# Altium PCB bluebox-micro-1B.PcbDoc
Units mm, origin at the board's own origin, x right, y up, seen from the top; angles counter-clockwise.
Board outline 62 x 18.68 mm, 4 copper layers (Top Layer, L2, L3, Bottom Layer), stack 0.722 mm thick; 94 components, 70 nets, 290 pads, 134 vias.
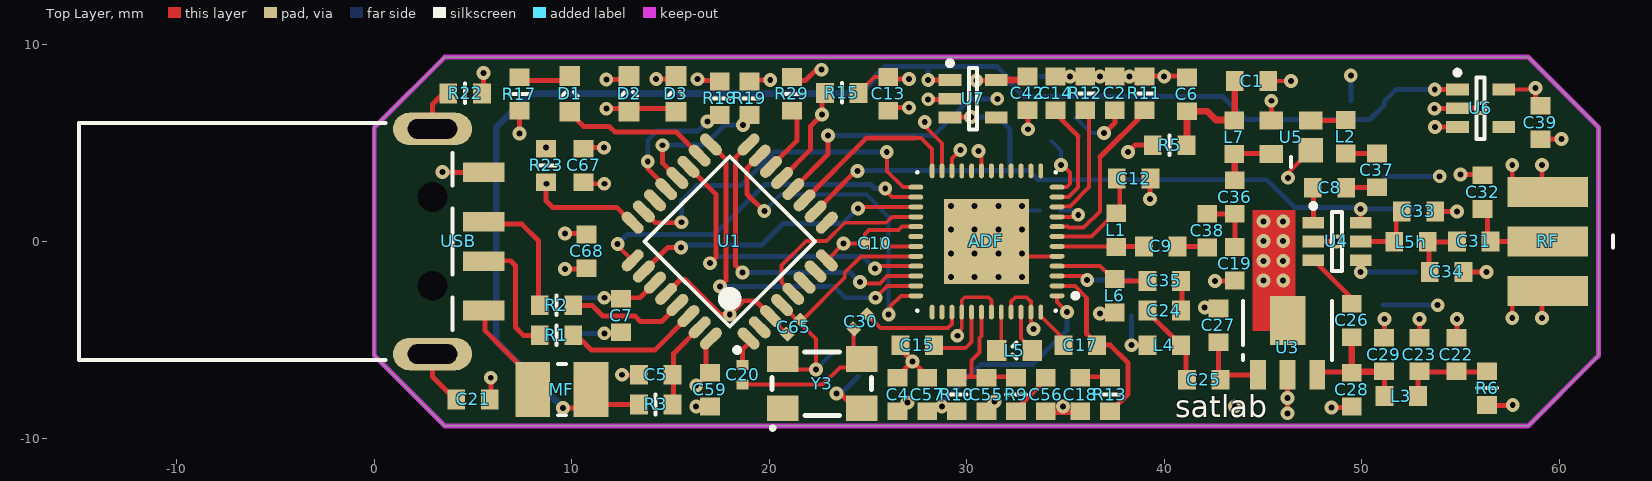
[diagram p0: Top Layer view]
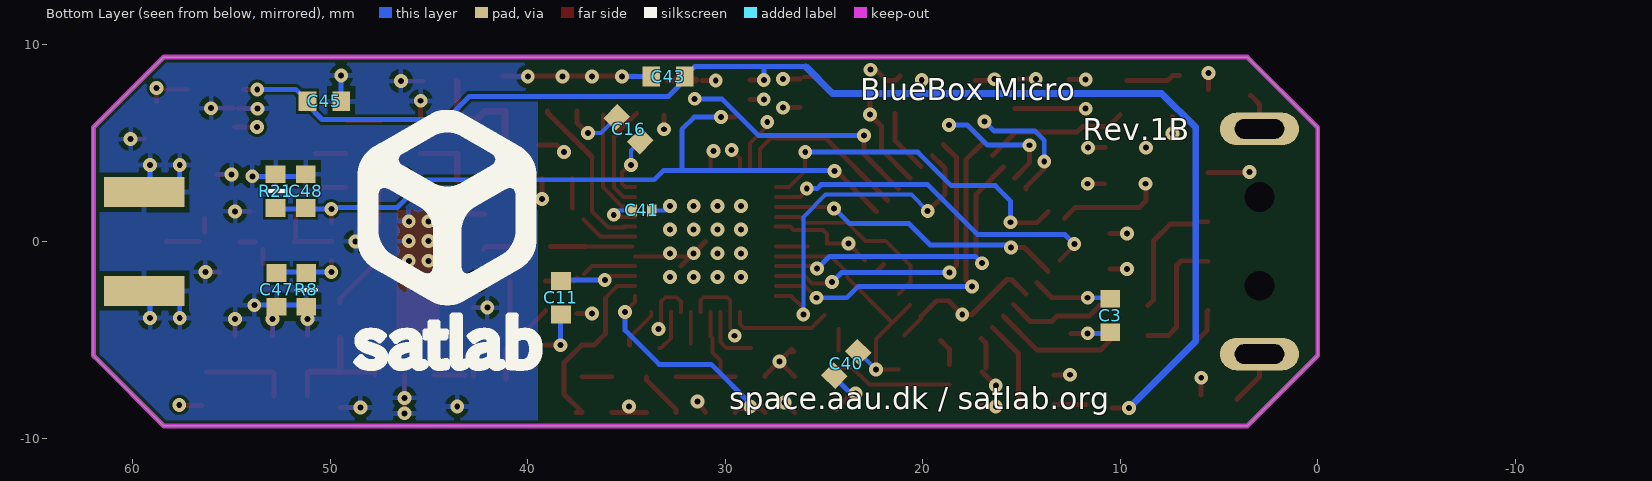
[diagram p1: Bottom Layer view, seen from below]
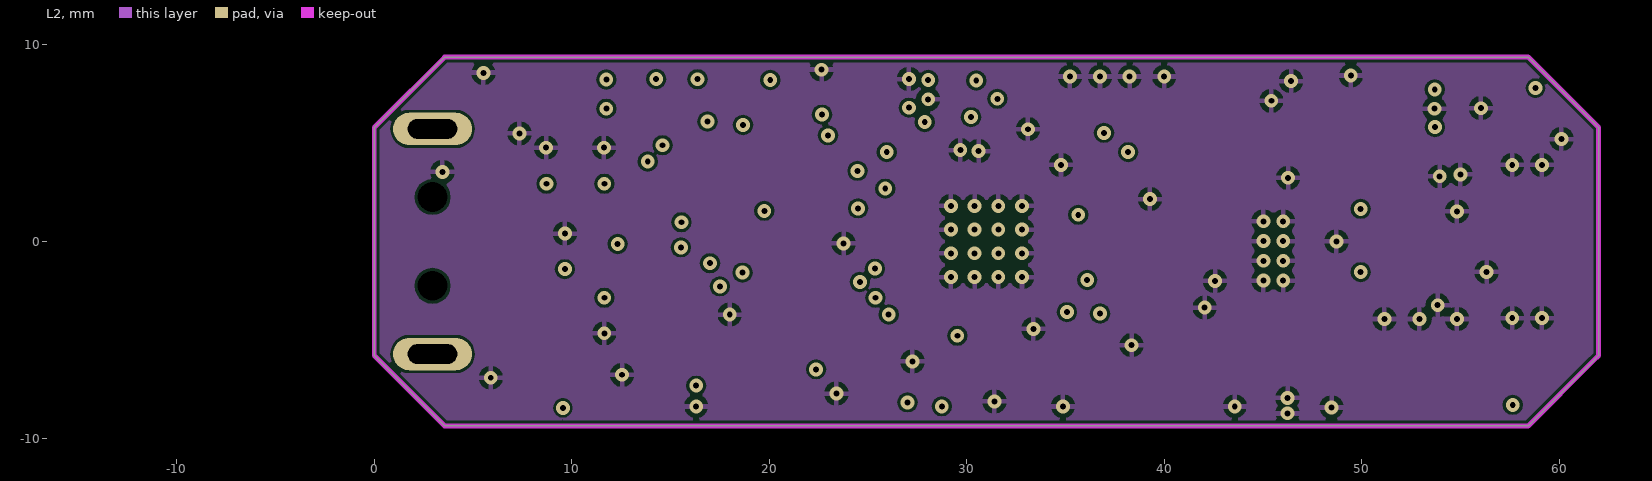
[diagram p2: L2]
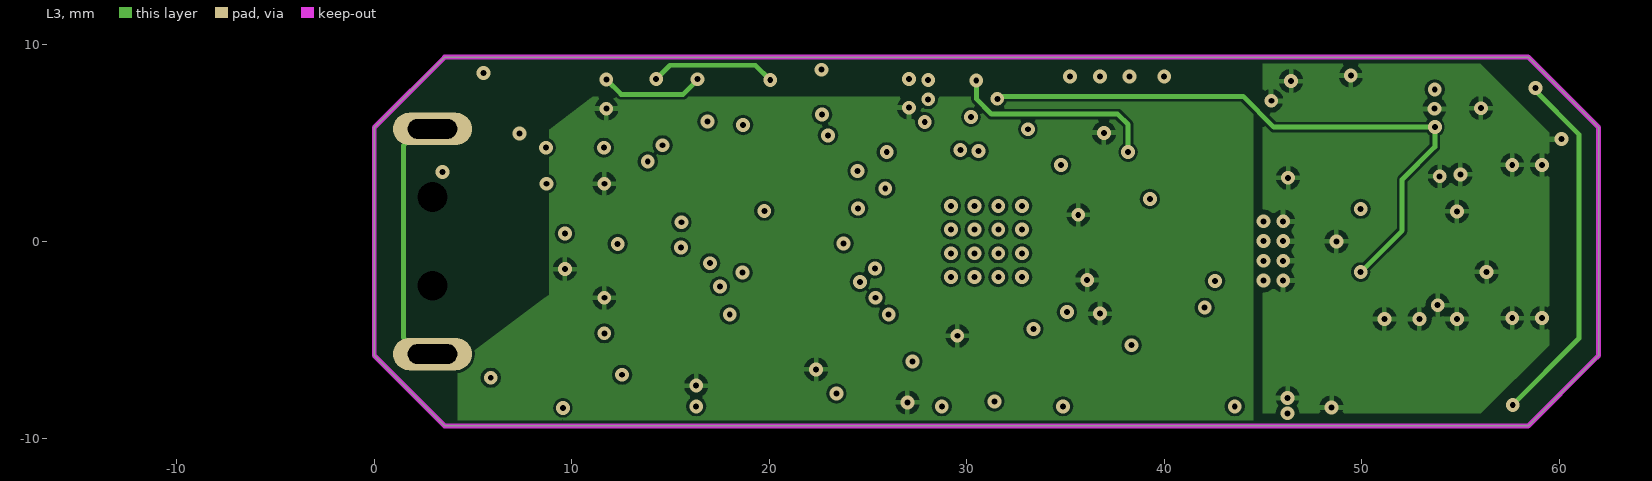
[diagram p3: L3]

## Layer stack, top to bottom
Top Solder: solder mask 0.0102, Solder Resist, Dk 3.5
Top Layer: signal copper 0.0356
Dielectric1: core 0.1981, FR-4, Dk 3.6
L2: signal copper 0.036
Dielectric 4: prepreg 0.127, Dk 4.2
L3: signal copper 0.0356
Dielectric2: core 0.254, FR-4, Dk 4.2
Bottom Layer: signal copper 0.0356
Bottom Solder: solder mask 0.0102, Solder Resist, Dk 3.5

## Board outline
3.566,-9.34 0,-5.774 0,5.772 3.566,9.338 3.566,9.34 58.434,9.34 61.734,6.04 62,5.774 62,-5.774 61.734,-6.04 58.434,-9.34

## Design rules (kind name [scope] priority, off if disabled: settings)
Clearance [All] p1: gap=0.15
MinimumSolderMaskSliver [All] p1: minsoldermaskwidth=0.075
PlaneClearance [All] p1: clearance=0.3
PlaneConnect [All] p1: planeconnectstyle=Relief reliefexpansion=0.15 reliefentries=4 reliefconductorwidth=0.254 reliefairgap=0.15
PolygonConnect [All] p1: connectstyle=Relief reliefconductorwidth=0.254 reliefentries=4 polygonreliefangle="90 Angle" airgapwidth=0.254
RoutingVias [All] p1: holewidth=0.3 width=0.5 viastyle="Through Hole" minholewidth=0.3 minwidth=0.5 maxholewidth=3 maxwidth=2
SilkToSolderMaskClearance SilkscreenOverComponentPads [IsPad] p1: minsilkscreentomaskgap=0.154 clearancetoexposedcopper=TRUE
SolderMaskExpansion [All] p1: expansion=0.075
Width [All] p1: maxlimit=2 minlimit=0.15 preferedwidth=0.2
25 further rules are at their usual default settings.

## Classes and differential pairs
component class transceiver: ADF C3 C4 C9 C9h C10 C11 C12 C12h C13 C14 C15 C16 C17 C18 C20 C30 C35 C40 C42h C55 C56 C57 C59 L1 L1h L5 L6 R9 R10 R11 R12 R13 Y3
component class mcu: C2 C5 C7 C21 C41 C60 C61 C62 C63 C64 C65 C67 C68 CaSS9 D1 D2 D3 MF Q4 R1 R2 R3 R15 R17 R18 R19 R22 R23 R29 R34 S1 U1 U2 USB Usw9 VR1
component class misc_rf: C1 C6 C8 C19 C22 C23 C24 C25 C26 C27 C28 C29 C31 C32 C33 C34 C36 C37 C38 C39 C42 C43 C45 C47 C48 C? L2 L3 L4 L5h L7 L? Q2 R5 R6 R8 R21 R? RF U3 U4 U5 U6 U7 U?

## Components (designator, comment, footprint, x,y, rotation, side; value= is the part's Value field where it differs from the comment)
ADF "ADF7021" QFN50P700X700X100-48M 31,0 r180 top
C1 "Cap Semi" C06 44.425,8.125 r0 top
C2 "Capacitor" C06 37.5,7.5 r270 top
C3 "Cap Semi" C06 10.5,-3.75 r90 bottom
C4 "Cap Semi" C06 26.5,-7.75 r270 top
C5 "Cap Semi" C06 14.25,-6.75 r0 top
C6 "Cap Semi" C06 41.15,7.45 r90 top
C7 "Cap Semi" C06 12.5,-3.75 r270 top
C8 "Cap Semi" C06 48.375,2.725 r0 top
C9 "Cap Semi" C06 39.825,-0.25 r180 top
C10 "Capacitor" C04 25.35,-0.1 r0 top
C11 "Cap Semi" C06 38.325,-2.85 r90 bottom
C12 "Cap Semi" C06 38.45,3.185 r180 top
C13 "Cap Semi" C06 26.025,7.475 r270 top
C14 "Cap Semi" C06 34.5,7.5 r270 top
C15 "Cap Semi" C06 27.5,-5.25 r0 top
C16 "Cap Semi" C06 34.9,5.685 r45 bottom
C17 "Cap Semi" C06 35.75,-5.25 r180 top
C18 "Cap Semi" C06 35.75,-7.75 r270 top
C19 "Cap Semi" C06 43.575,-1.125 r270 top
C20 "Capacitor" C04 18.65,-6.75 r270 top
C21 "Cap Semi" C06 5,-8 r0 top
C22 "Cap Semi" C06 54.8,-5.725 r90 top
C23 "Cap Semi" C06 52.925,-5.725 r90 top
C24 "Cap Semi" C06 40,-3.5 r180 top
C25 "Cap Semi" C06 42,-7 r0 top
C26 "Cap Semi" C06 49.5,-4 r270 top
C27 "Cap Semi" C06 42.75,-4.25 r270 top
C28 "Cap Semi" C06 49.5,-7.5 r270 top
C29 "Cap Semi" C06 51.125,-5.725 r90 top
C30 "Capacitor" C04 24.625,-4.075 r225 top
C31 "Capacitor" C06 55.675,0 r180 top
C32 "Capacitor" C06 56.125,2.5 r270 top
C33 "Cap Semi" C06 52.875,1.52 r0 top
C34 "Cap Semi" C06 54.3,-1.539 r0 top
C35 "Cap Semi" C06 40,-2 r0 top
C36 "Cap Semi" C06 43.575,2.25 r90 top
C37 "Cap Semi" C06 50.775,3.6 r90 top
C38 "Cap Semi" C06 42.175,0.55 r270 top
C39 "Capacitor" C06 59.05,6.025 r90 top
C40 "Cap Semi" C06 23.875,-6.2 r135 bottom
C41 "Capacitor" C04 34.225,1.575 r180 bottom
C42 "Capacitor" C06 33.075,7.5 r90 top
C43 "Capacitor" C06 32.9,8.35 r180 bottom
C45 "Capacitor" C06 50.3,7.1 r0 bottom
C47 "Capacitor" C06 52.725,-2.45 r270 bottom
C48 "Capacitor" C06 51.25,2.55 r90 bottom
C55 "Cap Semi" C06 31,-7.75 r90 top
C56 "Cap Semi" C06 34,-7.75 r90 top
C57 "Cap Semi" C06 28,-7.75 r270 top
C59 "Cap Semi" C06 17,-7.5 r90 top
C65 "Capacitor" C04 21.25,-4.349 r225 top
C67 "Capacitor" C06 10.6,3.85 r270 top
C68 "Capacitor" C06 10.75,-0.5 r270 top
D1 "RED" L06 9.9,7.475 r90 top
D2 "GREEN" L06 12.9,7.475 r90 top
D3 "BLUE" L06 15.278,7.475 r90 top
L1 "Inductor" C06 37.575,0.575 r270 top
L2 "Inductor" C06 49.2,5.3 r270 top
L3 "Inductor" C06 52,-7.825 r0 top
L4 "Inductor" C06 40,-5.25 r0 top
L5 "Inductor" L06 32.425,-5.521 r180 top
L5h "Inductor" C06 52.5,-0.015 r0 top
L6 "Inductor" C06 37.5,-2.75 r270 top
L7 "Inductor" C06 43.55,5.275 r90 top
MF "CapacitorBig" C1210 9.5,-7.5 r180 top
R1 "Resistor" R06 9.225,-4.749 r180 top
R2 "Resistor" R06 9.225,-3.225 r0 top
R3 "Resistor" R06 14.25,-8.25 r0 top
R5 "Resistor" R06 40.275,4.875 r180 top
R6 "Resistor" R06 56.35,-7.425 r270 top
R8 "Resistor" R06 51.225,-2.45 r90 bottom
R9 "Res Semi" R06 32.5,-7.75 r90 top
R10 "Res Semi" R06 29.5,-7.75 r90 top
R11 "Res Semi" R06 39,7.5 r90 top
R12 "Res Semi" R06 36,7.5 r270 top
R13 "Res Semi" R06 37.25,-7.75 r90 top
R15 "Resistor" R06 23.675,7.525 r180 top
R17 "Resistor" R06 7.353,7.468 r90 top
R18 "Resistor" R06 17.5,7.25 r90 top
R19 "Resistor" R06 19,7.25 r90 top
R21 "Resistor" R06 52.775,2.55 r270 bottom
R22 "Resistor" R06 4.6,7.5 r0 top
R23 "Resistor" R06 8.7,3.85 r270 top
R29 "Resistor" R06 21.15,7.475 r270 top
RF "50 Ohm - Linx CONSMA003.062" SMA-EGDE 61.425,0 r0 top
U1 "ATmega32U2-AU" 32A_L 18,0 r135 top
U3 "MGA-31589" SOT-223B-SMALL 46.25,-4.5 r0 top
U4 "AS193-73" SOT95P280X145-6N 48.75,0 r0 top
U5 "MBC13916" MBC13916 46.425,5.275 r90 top
U6 "" SOT23 56.025,6.75 r0 top
U7 "" SOT23 30.325,7.225 r0 top
USB "1470695-2" 1470695A 0.25,0 r180 top
Y3 "FOX924B" FOX924 20.675,-5.95 r0 top

## Footprints (in the part's own frame and the unit in brackets; to place one, negate y for a bottom-side part, rotate by r counter-clockwise, add the part's x,y. Pads: shape width x height; smd on the part's side, far side on the other; paste and mask are expansions set on the pad)
32A_L [mm] "Thin QFP, 32-Leads, Body 7x7mm, Pitch 0.8mm, IPC High Density"
  oval 1.35x0.55 smd: 1(-4.15,2.8) 2(-4.15,2) 3(-4.15,1.2) 4(-4.15,0.4) 5(-4.15,-0.4) 6(-4.15,-1.2) 7(-4.15,-2) 8(-4.15,-2.8) 17(4.15,-2.8) 18(4.15,-2) 19(4.15,-1.2) 20(4.15,-0.4) 21(4.15,0.4) 22(4.15,1.2) 23(4.15,2) 24(4.15,2.8)
  oval 0.55x1.35 smd: 9(-2.8,-4.15) 10(-2,-4.15) 11(-1.2,-4.15) 12(-0.4,-4.15) 13(0.4,-4.15) 14(1.2,-4.15) 15(2,-4.15) 16(2.8,-4.15) 25(2.8,4.15) 26(2,4.15) 27(1.2,4.15) 28(0.4,4.15) 29(-0.4,4.15) 30(-1.2,4.15) 31(-2,4.15) 32(-2.8,4.15)
  silkscreen extent -4.27,-3.05 3.05,3.75, body extent -3.5,-3.5 3.5,3.5, height 1.2
1470695A [mm] "Connector; USB1.1, Type A, SM; 4 Position; Right Angle"
  rect 2.1x1 smd: 1(-5.3,3.5) 2(-5.3,1) 3(-5.3,-1) 4(-5.3,-3.5)
  oval 4x1.65 hole 1 slot 2.5 at 0 deg: 5(-2.7,-5.7) 6(-2.7,5.7)
  round 1.2 hole 1.5 unplated: MH1(-2.7,-2.25) MH2(-2.7,2.25)
  silkscreen extent -3.7,-6 15.2,6
C04 [mm] "Chip Capacitor, 2-Leads, Body 1.0x0.5mm, IPC Low Density"
  rrect10% 0.5x0.6 smd: 1(-0.5,0) 2(0.5,0)
  body extent -0.5,-0.25 0.5,0.25, height 0.52
C06 [mm]
  rect 0.9x1 smd: 1(-0.85,0) 2(0.85,0)
  body extent -0.8,-0.41 0.8,0.41, height 0.82
C1210 [mm] "Chip Capacitor, 2-Leads, Body 3.2x2.5mm, IPC Low Density"
  rect 1.75x2.8 smd: 1(-1.475,0) 2(1.475,0)
  silkscreen extent -0.2,-1.3 0.2,1.3, body extent -1.75,-1.35 1.75,1.35, height 2.7
FOX924 [mm]
  rect 1.6x1.3 smd: 1(0,-2.5) 2(4,-2.5) 3(4,0) 4(0,0)
  silkscreen extent -0.56,-3.56 4.5,0.35, body extent -0.53,-2.83 4.5,0.35, height 1.5
L06 [mm] "Chip LED, 2-Leads, Body 1.6x0.8mm, IPC Low Density"
  rect 1x1.05 smd: 1(-0.9,0) 2(0.9,0)
  silkscreen extent -0.1,-0.4 0.1,0.4, body extent -0.85,-0.45 0.85,0.45, height 0.9
MBC13916 [mm] "SOT-143; 4 Leads; FOR LNA"
  rect 1.25x1.25 smd: 1(-0.65,-1)
  rect 0.9x1.2 smd: 2(0.85,-1) 3(0.85,1) 4(-0.85,1)
  silkscreen extent -1.5,0 -1,0
QFN50P700X700X100-48M [mm]
  oval 0.75x0.25 smd mask+0.154: 1(-3.575,2.75) 2(-3.575,2.25) 3(-3.575,1.75) 4(-3.575,1.25) 5(-3.575,0.75) 6(-3.575,0.25) 7(-3.575,-0.25) 8(-3.575,-0.75) 9(-3.575,-1.25) 10(-3.575,-1.75) 11(-3.575,-2.25) 12(-3.575,-2.75) 25(3.575,-2.75) 26(3.575,-2.25) 27(3.575,-1.75) 28(3.575,-1.25) 29(3.575,-0.75) 30(3.575,-0.25) 31(3.575,0.25) 32(3.575,0.75) 33(3.575,1.25) 34(3.575,1.75) 35(3.575,2.25) 36(3.575,2.75)
  oval 0.25x0.75 smd mask+0.154: 13(-2.75,-3.575) 14(-2.25,-3.575) 15(-1.75,-3.575) 16(-1.25,-3.575) 17(-0.75,-3.575) 18(-0.25,-3.575) 19(0.25,-3.575) 20(0.75,-3.575) 21(1.25,-3.575) 22(1.75,-3.575) 23(2.25,-3.575) 24(2.75,-3.575) 37(2.75,3.575) 38(2.25,3.575) 39(1.75,3.575) 40(1.25,3.575) 41(0.75,3.575) 42(0.25,3.575) 43(-0.25,3.575) 44(-0.75,3.575) 45(-1.25,3.575) 46(-1.75,3.575) 47(-2.25,3.575) 48(-2.75,3.575)
  rect 4.3x4.3 smd mask+0.154: 49(0,0)
  silkscreen extent -4.62,-3.53 3.53,3.52, body extent -3.5,-3.5 3.5,3.5, height 1
R06 [mm]
  rect 0.9x1 smd: 1(-0.85,0) 2(0.85,0)
  silkscreen extent 0,-0.5 0,0.5, body extent -0.8,-0.4 0.8,0.4, height 0.55
SMA-EGDE [mm] "Linx CONSMA003.062"
  rect 4.06x1.52 smd: 1(-2,-2.5) 1(-2,2.5) 2(-2,0)
  rect 4.06x1.52 smd far side: 1(-2,-2.5) 1(-2,2.5)
  silkscreen extent 1.3,-0.3 1.3,0.3
SOT23 [mm] "SOT23, 5-Leads, Body 3,1x3,2mm (max), Pitch 0,95mm, IPC Medium Density"
  rect 1.15x0.6 smd: 1(-1.175,0.95) 2(-1.175,0) 3(-1.175,-0.95) 4(1.175,-0.95) 5(1.175,0.95)
  silkscreen extent -1.3,-1.55 0.2,1.92, body extent -0.9,-1.55 0.9,1.55, height 1.45
SOT95P280X145-6N [mm] "SOT23, 6-Leads, Body 3,0x3,0mm (max), Pitch 0,95mm, IPC Medium Density"
  rect 1.1x0.6 smd: 1(-1.2,0.95) 2(-1.2,0) 3(-1.2,-0.95) 4(1.2,-0.95) 5(1.2,0) 6(1.2,0.95)
  silkscreen extent -1.32,-1.5 0.25,1.92, body extent -0.87,-1.52 0.87,1.53, height 1.45
SOT-223B-SMALL [mm] "used for PA in bluebox micro"
  rect 0.8x1.5 smd: 1(-1.5,-2.25) 2(0,-2.25) 3(1.5,-2.25)
  rect 1.8x2.5 smd: 4(0,0.5)
  silkscreen extent -2.25,-1.5 2.25,1.5

## Part data
ADF: "ADF7021 transceiver"
C1 C3 C4 C5 C6 C7 C8 C9 C11 C12 C13 C14 C15 C16 C17 C18 C19 C21 C22 C23 C24 C25 C26 C27 C28 C29 C33 C34 C35 C36 C37 C38 C40 C55 C56 C57 C59: "Capacitor (Semiconductor SIM Model)"
C2 C10 C20 C30 C31 C32 C39 C41 C42 C43 C45 C47 C48 C65 C67 C68: "Capacitor, standard"
D1 D2 D3: library part LED, "Typical RED GaAs LED"
MF: "Capacitor for PRU etc."
R9 R10 R11 R12 R13: "Semiconductor Resistor"
RF: library part SMA_BOARD_EGDE, "Linx CONSMA003.062  -  SMA Female Edge Mount for 1.6 mm PCB"
U1: "8-bit AVR Microcontroller, 2.7-5.5V, 32KB Flash, 1KB EEPROM, 1KB SRAM, 32-pin TQFP, Industrial Grade (-40°C to 85°C)"
U3: "0.5 W High Gain Driver Amplifier"
U4: "PHEMT GaAs IC High-Linearity 3 V  Control SPDT Switch 0.1–2.5 GHz"
U6 U7: library part TC1185, "Voltage regulater from Microchip"
USB: "USB 1.1, Right Angle, SMT, A Type, Plug, 4 Position, Natural"
Y3: "FOX924B TCXO 19.44 MHz"

## Via types
v1: diameter 0.7, hole 0.3, Top Layer to Bottom Layer, tented both sides, 118 vias
v2: diameter 0.7, hole 0.3, Top Layer to Bottom Layer, 16 vias

## Nets (pads, with @x,y where several pads share a name; then routed paths per layer and width w, separated by ;. In a path a pad name is that pad's centre, name@x,y a point inside that pad or via, vN(x,y) a via of type N, cw(c..) or ccw(c..) an arc to the next point about the centre after c; other vN are vias at no path point)
C-RX: C48.1 R21.2 U1.10 U4.6 U7.3 | length 37.9
  Top Layer w0.25: U1.10 24.353,3.55 v1@24.5,3.55 ; U7.3@29.515,6.3 v1(30.215,6.3) ; U4.6 v1(49.95,1.65)
  Bottom Layer w0.25: v1@24.5,3.55 24.65,3.675 24.725,3.6 32.2,3.6 ; v1(30.215,6.3) 31.575,6.3 32.2,5.675 32.2,3.6 ; R21.2@52.775,1.65 v1(49.95,1.65) 49.875,1.725 46.6,1.725 45.2,3.125 33.6,3.125 33.125,3.6 32.2,3.6
  other v1: 24.475,3.575
C-TX: C47.1 R8.2 U1.12 U4.4 U6.3 | length 49
  Top Layer w0.25: U1.12 22.975,4.409 v1(22.975,5.375) ; v1(49.95,-1.55) U4.4 ; v1(53.71,5.793) U6.3@54.85,5.793
  L3 w0.25: v1@31.65,7.25 31.75,7.35 44,7.35 45.557,5.793 v1(53.71,5.793) 53.71,4.795 52.05,3.135 52.05,0.55 v1(49.95,-1.55)
  Bottom Layer w0.25: v1(22.975,5.375) 28.325,5.375 30.175,7.225 v1(31.55,7.225) ; v1(49.95,-1.55) C47.1@52.725,-1.55
CE: ADF.24 U1.11 | length 9.1
  Top Layer w0.2: 27.4,5.25 27.675,5.25 28.25,4.675 ADF.24
  Top Layer w0.25: U1.11 24.947,5.25 27.398,5.25
CLK_OUT: ADF.36 U1.15 | length 17.2
  Top Layer w0.2: v1@26.15,-3.525 26.15,-3.275 26.675,-2.75 ADF.36
  Top Layer w0.25: U1.15 18.875,3.703 18.875,2.4 v1@19.725,1.55
  Bottom Layer w0.2: v1(19.75,1.55) 20.575,2.375 24.925,2.375 26.05,1.25 v1(26.05,-3.7)
CPOUT: ADF.42 C55.2 R9.2 R10.2 | length 6.5
  Top Layer w0.2: 30.25,-6.85 30.25,-6.025 30.65,-5.625 30.65,-4.875 30.75,-4.775 ADF.42
  Top Layer w0.25: R10.2@29.5,-6.85 R9.2@32.5,-6.85
CREG3: ADF.41 C15.2 | length 3.2
  Top Layer w0.2: C15.2@28.7,-5.4 29.95,-5.4 30.25,-5.1 ADF.41
D+: R2.1 USB.3 | length 6.6
  Top Layer w0.25: USB.3 6.2,1 6.325,0.875 7.475,0.875 8.325,0.025 8.325,-2.975 R2.1@8.6,-3.25
D-: R1.2 USB.2 | length 6.6
  Top Layer w0.25: USB.2 USB.2@6.2,-1 ; USB.2@6.05,-0.975 6.9,-0.975 7.15,-1.225 7.15,-4.35 7.55,-4.75 R1.2@8.6,-4.75
DATA_CLK: ADF.35 U1.17 | length 18.2
  Top Layer w0.2: v1(25.375,-2.85) 25.975,-2.25 ADF.35
  Top Layer w0.25: U1.17 17.8,4.16 17.8,-1.975 v1(17.5,-2.275)
  Bottom Layer w0.25: v1@17.6,-2.375 v1(17.5,-2.275) 23.275,-2.275 23.85,-2.85 v1(25.375,-2.85)
DATA_IO: ADF.34 U1.16 | length 16.2
  Top Layer w0.2: v1(24.588,-2.05) 24.663,-2.125 25.6,-2.125 25.975,-1.75 ADF.34
  Top Layer w0.25: v1(18.65,-1.575) 18.3,-1.225 18.3,4.26 U1.16 ; v1@24.675,-1.925 v1@24.725,-1.875
  Bottom Layer w0.25: v1@18.675,-1.55 v1(18.65,-1.575) 24.113,-1.575 v1(24.588,-2.05)
GND: ADF.5 ADF.12 ADF.19 ADF.22 ADF.29 ADF.45 ADF.47 ADF.49 C1.2 C2.1 C3.1 C4.1 C5.1 C6.2 C7.2 C10.1 C11.1 C12.1 C13.1 C14.1 C15.1 C16.1 C18.2 C19.2 C21.2 C22.2 C23.2 C27.1 C28.2 C29.2 C32.1 C33.2 C34.2 C39.1 C40.1 C41.2 C42.1 C43.1 C45.1 C47.2 C48.2 C55.1 C56.1 C57.1 C59.1 C65.2 C67.1 C68.1 L4.1 R8.1 R11.2 R12.1 R15.1 R17.1 R21.1 R22.2 R23.1 R29.1 RF.1 U1.3 U1.8 U1.28 U3.2 U3.4 U4.2 U5.1 U5.3 U6.2 U7.2 USB.4 Y3.2 | length 97.1
  Top Layer w0.2: U1.3@20.086,-3.893 C65.2@20.921,-4.729 ; U1.8 v1(23.769,-0.1) C10.1 ; R15.1 25.325,8.325 C13.1 ; C10.1@24.855,-0.075 24.855,0.38 25.05,0.575 26.55,0.575 26.725,0.75 ADF.29@27.45,0.75 ; ADF.22 29.25,4.2 v1(29.675,4.625) ; ADF.19 v1@30.75,4.35 ; ADF.49@31.75,-0.75 ADF.5 ; ADF.45 32.25,-3.05 32.475,-2.825 33.025,-2.825 33.25,-3.05 ADF.47 v1@33.25,-4.325 ; ADF.12 35.05,2.75 35.225,2.925 35.225,3.5 v1@34.9,3.825 ; C1.2 v1(46.425,8.125) ; v1(46.275,3.225) 46.275,3.475 U5.1
  Top Layer w0.25: v1@3.475,3.5 USB.4 ; R22.2@5.525,7.689 v1(5.525,8.539) ; C21.2@5.9,-7.775 v1@5.9,-6.925 ; R17.1@6.975,6.625 R17.1@7,6.6 ; v1(7.35,5.475) R17.1@7.35,6.325 ; v1@9.675,0.4 C68.1@10.525,0.4 ; C67.1@10.775,4.75 v1(11.625,4.75) ; v1(11.65,-4.65) C7.2@12.5,-4.65 ; v1(12.55,-6.75) C5.1@13.35,-6.75 ; U1.28 15.509,-1.925 15.733,-1.925 17.508,-3.7 v1(18,-3.7) 18.7,-3 19.303,-3 U1.3 ; v1@16.3,-8.4 C59.1@17,-8.4 ; v1@16.35,-8.3 C59.1@17.05,-8.3 ; R29.1@21.15,8.375 21.375,8.15 21.825,8.15 22.375,8.7 v1@22.475,8.7 ; v1@23.6,-7.7 Y3.2@24.4,-8.5 ; C13.1@26.225,8.225 v1(27.075,8.225) ; C4.1@26.5,-6.85 26.5,-6.825 v1(27.25,-6.075) ; C15.1@26.65,-5.45 26.525,-5.575 26.775,-5.575 28,-6.8 C57.1@28,-6.85 ; v1(28.05,7.2) U7.2@28.75,7.2 ; C55.1@31,-8.65 v1(31.4,-8.1) ; ADF.49 ADF.49@32.25,-1.25 ; v1(33.1,5.685) C42.1@33.1,6.385 ; C56.1@34,-8.65 C18.2@35.75,-8.65 ; C14.1@34.5,8.375 C6.2@41.25,8.375 ; v1(38.35,-5.25) L4.1@39.1,-5.25 ; v1@39.275,2.075 C12.1@39.275,3.185 ; v1(42.05,-3.35) C27.1@42.75,-3.35 ; v1(42.575,-2) C19.2@43.275,-2 ; 44.7,-4 U3.4 ; U5.3@45.425,6.15 45.425,7.075 v1@45.55,7.2 ; U3.4@45.525,-3.625 45.525,-2.175 ; v1(46.25,-8.7) U3.2@46.25,-7.25 ; v1@46.25,-7.85 U3.2 ; U4.2 v1@48.7,0 ; v1@48.625,-8.4 C28.2@49.5,-8.4 ; C29.2@51.15,-4.75 v1@51.15,-3.95 ; C23.2@52.925,-4.75 v1@52.925,-3.95 ; v1(53.685,6.725) U6.2@54.675,6.725 ; C33.2@54.075,1.525 v1(54.825,1.525) ; C22.2@54.825,-4.75 v1@54.825,-3.95 ; U6.2@54.925,6.75 v1(56.04,6.75) ; v1(55,3.4) C32.1@55.75,3.4 ; C34.2@55.575,-1.539 v1(56.325,-1.539) ; v1(57.625,-3.875) RF.1@57.625,-3.175 ; RF.1@57.625,3.175 v1(57.625,3.875) ; v1(59.125,-3.875) RF.1@59.125,-3.2 ; RF.1@59.125,3.025 v1(59.125,3.875) ; C39.1@59.415,5.186 v1(60.115,5.186)
  Bottom Layer w0.2: v2(32.8,1.8) 33.025,1.575 C41.2 ; C16.1 34.775,4.608 v1(34.775,3.875)
  Bottom Layer w0.25: C3.1@10.5,-4.65 v1(11.65,-4.65) ; v1@23.6,-7.7 23.648,-7.7 C40.1@24.511,-6.836 ; C43.1 v1(35.225,8.35) ; v1(38.35,-5.25) C11.1@38.35,-3.775 ; C45.1 v1@49.45,8.325 ; R8.1@51.075,-3.225 v1(53.85,-3.225) ; C48.2@51.175,3.3 v1(53.95,3.3) ; v1(57.625,-3.875) RF.1@57.625,-3.175 ; RF.1@57.625,3.175 v1(57.625,3.875) ; v1(59.125,-3.875) RF.1@59.125,-2.85 ; RF.1@59.125,2.85 v1(59.125,3.875)
  other v1: 48.475,-8.4 16.3,-8.35 34.875,-8.35 43.575,-8.35 46.25,-7.925 23.4,-7.7 5.9,-6.9 33.375,-4.429 51.15,-3.925 52.925,-3.925 54.825,-3.925 45.025,-1.979 46.025,-1.979 45.025,-0.979 46.025,-0.979 48.725,0 45.025,0.021 46.025,0.021 9.65,0.4 45.025,1.021 46.025,1.021 39.275,2.15 3.45,3.525 30.6,4.575 8.7,4.75 45.425,7.125 36.75,8.35 38.25,8.35 40,8.35 49.45,8.4 22.65,8.7
  other v2: 29.2,-1.8 30.4,-1.8 31.6,-1.8 32.8,-1.8 29.2,-0.6 30.4,-0.6 31.6,-0.6 32.8,-0.6 29.2,0.6 30.4,0.6 31.6,0.6 32.8,0.6 29.2,1.8 30.4,1.8 31.6,1.8
HWB: R15.2 U1.13 | length 5
  Top Layer w0.25: U1.13 22.1,4.666 22.1,5.85 v1(22.675,6.425) R15.2@22.675,7.375
L1: ADF.46 L5.1 | length 2.1
  Top Layer w0.2: ADF.46 32.75,-4.9 33.25,-5.4 L5.1@33.325,-5.4
L2: ADF.44 L5.2 | length 1.6
  Top Layer w0.2: L5.2@31.75,-5.175 ADF.44
LED_P: R19.1 U1.20 | length 6.5
  Top Layer w0.25: v1(14.6,4.875) 14.6,3.966 U1.20
  Bottom Layer w0.25: v1(14.6,4.875) 16.725,4.875 17.75,5.9 v1(18.675,5.9)
LED_R: R18.1 U1.21 | length 6.3
  Top Layer w0.25: v1(13.85,4.05) 13.85,3.675 14.783,2.742 U1.21
  Bottom Layer w0.25: v1(13.85,4.05) 13.85,5.125 14.325,5.6 16.4,5.6 v1(16.875,6.075)
LED_T: D1.1 U1.18 | length 7.3
  Top Layer w0.25: D1.1@10,6.425 10.6,5.825 11.906,5.825 12.181,5.55 15.278,5.55 U1.18
MUXOUT: U1.7 | length 0.5
  Top Layer w0.25: U1.7@21.975,-1.15 U1.7@22.35,-1.525
NetADF_2: ADF.2 C17.1 R13.1 | length 9.5
  Top Layer w0.2: ADF.2 35.475,-2.25 36.075,-2.85
  Top Layer w0.25: 36.075,-2.85 36.075,-4.675 36.65,-5.25 37.275,-5.25 38.175,-6.15 38.175,-7.725 37.25,-8.65 R13.1@37.55,-8.65
NetADF_4: ADF.4 C35.1 L6.1 | length 4.4
  Top Layer w0.2: ADF.4 36.75,-1.25 L6.1@37.15,-1.65
  Top Layer w0.25: L6.1@37.5,-1.85 37.65,-2 C35.1@39.1,-2
NetADF_6: ADF.6 C9.2 L1.2 | length 4.1
  Top Layer w0.2: ADF.6@34.7,-0.25 37.025,-0.25
  Top Layer w0.25: L1.2@37.1,-0.25 C9.2@38.85,-0.25
NetADF_7: ADF.7 C12.2 L1.1 | length 4.5
  Top Layer w0.2: ADF.7 36.325,0.25 L1.1@37.187,1.112
  Top Layer w0.25: L1.1@37.75,1.7 C12.2@37.75,3.2
NetADF_8: ADF.8 R11.1 | length 8.5
  Top Layer w0.2: ADF.8 35.1,0.75 35.15,0.7 35.925,0.7 36.75,1.525 36.75,4.275
  Top Layer w0.25: 36.75,4.275 39,6.525 R11.1@39,6.6
NetADF_10: ADF.10 R12.2 | length 5.7
  Top Layer w0.2: ADF.10 34.6,1.775 35.225,1.775 36.2,2.75 36.2,6.4 R12.2@36.175,6.425
NetADF_11: ADF.11 C14.2 | length 5.5
  Top Layer w0.2: ADF.11 35.15,2.25 35.625,2.725 35.625,5.35
  Top Layer w0.25: C14.2@34.5,6.475 35.625,5.35
NetADF_31: ADF.31 C10.2 | length 1.6
  Top Layer w0.2: C10.2@25.825,-0.25 ADF.31
NetADF_39: ADF.39 C30.1 | length 5.2
  Top Layer w0.2: C30.1 25.632,-4.375 29.05,-4.375 29.25,-4.175 ADF.39
NetADF_48: ADF.48 C17.2 | length 2.1
  Top Layer w0.2: ADF.48 33.75,-3.775 C17.2@34.85,-4.875
  Top Layer w0.25: C17.2@34.85,-5.25 C17.2@34.85,-4.875
NetC1_1: C1.1 C6.1 L7.2 R5.1 | length 6.4
  Top Layer w0.34: R5.1 41.15,4.9 C6.1 42.175,6.6 42.625,6.15 L7.2@43.575,6.15 ; L7.2 L7.2@43.575,6.15 ; C1.1 L7.2@43.575,6.15
NetC5_2: C5.2 R3.2 U1.31 | length 4.5
  Top Layer w0.25: R3.2@15.15,-8.25 15.15,-5.678 U1.31
NetC8_2: C8.2 C37.1 | length 1.5
  Top Layer w0.25: C8.2 C37.1@50.75,2.725
NetC18_1: C18.1 R13.2 | length 1.5
  Top Layer w0.25: C18.1@35.75,-6.85 R13.2@37.25,-6.85
NetC19_1: C19.1 C36.1 C38.1 | length 3.1
  Top Layer w0.25: C38.1 C36.1 C19.1
NetC20_2: C20.2 C30.2 Y3.3 | length 7.2
  Top Layer w0.2: C20.2 22.7,-7.25 23.575,-6.375 Y3.3@24.375,-6.375 ; Y3.3@24.271,-5.521 C30.2
NetC21_1: C21.1 R22.1 USB.5 USB.6 | length 18
  Top Layer w0.25: USB.6 2.95,-6.85 C21.1@4.1,-8 ; USB.5 2.95,6.95 R22.1@3.4,7.4
  L3 w0.25: USB.6 2.3,-5.7 1.475,-4.875 1.475,4.85 2.325,5.7 USB.5
NetC22_1: C22.1 C23.1 L3.2 R6.1 | length 4.5
  Top Layer w0.25: L3.2 C23.1@52.85,-6.65 ; C23.1@52.925,-6.6 R6.1@56.275,-6.6
NetC24_2: C24.2 C25.1 L4.2 | length 4.1
  Top Layer w0.25: C24.2@39.1,-3.5 L4.2 L4.2@40.9,-5.25 ; C25.1@41.1,-7 L4.2@41.1,-5.45
NetC25_2: C25.2 C27.2 U3.1 | length 3.3
  Top Layer w0.25: C25.2@42.75,-6.85 C27.2@42.75,-5.15 ; C25.2@43.15,-6.75 U3.1
NetC26_2: C26.2 C28.1 C29.1 L3.1 U3.3 | length 6.7
  Top Layer w0.25: U3.3 U3.3@47.75,-6.125 ; U3.3@47.9,-6.6 C28.1@49.5,-6.6 ; L3.1 C29.1@51.15,-6.6
  Top Layer w0.34: C26.2@49.5,-4.9 49.5,-6.6 C29.1@51,-6.6
NetC31_2: C31.2 C34.1 L5h.2 | length 1.5
  Top Layer w0.25: C34.1@53.4,-1.154 L5h.2@53.4,-0.404 ; 53.821,-0.025 C31.2@54.571,-0.025
NetC33_1: C33.1 L5h.1 U4.5 | length 3.2
  Top Layer w0.25: U4.5@49.925,0 L5h.1@51.85,0 ; L5h.1@51.75,0.1 C33.1@51.75,1.35
NetC36_2: C36.2 L7.1 U5.4 | length 3.2
  Top Layer w0.25: L7.1@43.525,4.45 U5.4@45.45,4.45
  Top Layer w0.34: C36.2 L7.1@43.575,4.4
NetC37_2: C37.2 L2.2 | length 1.6
  Top Layer w0.25: L2.2 C37.2
NetC56_2: C56.2 R9.1 | length 2.4
  Top Layer w0.25: R9.1@32.5,-8.65 32.5,-8.5 34,-7 C56.2@34,-6.85
NetD1_2: D1.2 R17.2 | length 2.8
  Top Layer w0.25: R17.2@7,8.4 7.35,8.4 7.6,8.15 D1.2@9.65,8.15
NetD2_2: D2.2 R18.2 | length 7.2
  Top Layer w0.25: v1(11.75,8.2) D2.2@12.6,8.2 ; v1@16.35,8.275 16.475,8.15 R18.2@17.325,8.15
  L3 w0.25: v1(11.75,8.2) 12.5,7.45 15.64,7.45 16.407,8.218 v1@16.35,8.275
  other v1: 16.365,8.218
NetD3_2: D3.2 R19.2 | length 8.1
  Top Layer w0.25: v1(14.275,8.225) D3.2@15.125,8.225 ; R19.2@19.2,8.175 v1(20.05,8.175)
  L3 w0.25: v1(14.275,8.225) 14.975,8.925 19.3,8.925 v1(20.05,8.175)
NetL2_1: L2.1 U5.2 | length 1.8
  Top Layer w0.25: U5.2 L2.1@49.175,6.125
NetMF_2: MF.2 USB.1 | length 4.5
  Top Layer w0.25: USB.1 5.6,-3.55 5.6,-4.5 MF.2@8.025,-6.925
NetR1_1: R1.1 U1.30 | length 6.6
  Top Layer w0.25: R1.1@10.4,-4.75 10.4,-4.9 11,-5.5 14.197,-5.5 U1.30
NetR2_2: R2.2 U1.29 | length 5.7
  Top Layer w0.25: R2.2@10.4,-3.25 11.05,-3.25 11.583,-3.783 13.208,-3.783 13.475,-4.05 14.55,-4.05 U1.29@15.4,-3.2
NetR23_2: R23.2 U1.24 | length 5.4
  Top Layer w0.25: R23.2@8.7,2.925 8.7,2.05 9.025,1.725 12.275,1.725 U1.24@12.836,1.164
  other v1: 8.725,2.925
NetR29_2: R29.2 U1.14 | length 3.2
  Top Layer w0.25: U1.14 21.4,5.097 R29.2@21.4,6.475
PA_IN: C24.1 C35.2 | length 1.5
  Top Layer w0.25: C24.1@40.9,-3.5 C35.2@40.9,-2
PA_OUT: C26.1 U4.3 | length 2.9
  Top Layer w0.25: U4.3@47.575,-0.95 49.5,-2.875 C26.1@49.5,-3.1
RF: C31.1 C32.2 RF.2 | length 2.4
  Top Layer w0.25: C31.1@56.375,0.45 C32.2@56.375,1.2 ; C31.1@56.66,0 RF.2@58.3,0
RF_LNA_IN: C8.1 U4.1 | length 2
  Top Layer w0.25: U4.1 C8.1@47.55,3
RF_LNA_OUT: C9.1 C38.2 | length 1.7
  Top Layer w0.25: C9.1@40.65,-0.25 42.1,-0.25 C38.2@42.25,-0.4
SCCLK: ADF.28 U1.5 | length 9.5
  Top Layer w0.2: U1.5 20.625,-2.059 20.625,-1.225 21.875,0.025 22.9,0.025 23.825,0.95 25.925,0.95 26.225,1.25 ADF.28
SDATA: ADF.26 U1.25 | length 17.6
  Top Layer w0.2: v1@12.325,-0.194 U1.25 ; v1@25.9,2.575 26.225,2.25 ADF.26
  Bottom Layer w0.25: v1(12.325,-0.125) 12.8,0.35 17.225,0.35 19.75,2.875 25.15,2.875 25.35,2.675 v1@25.825,2.675
  other v1: 25.875,2.675
SLE: ADF.25 U1.23 | length 17.4
  Top Layer w0.2: v1@25.975,4.475 25.975,3.55 26.775,2.75 ADF.25
  Top Layer w0.25: U1.23 14.222,0.95 v1@15.575,0.95
  Bottom Layer w0.25: v1@15.562,0.988 15.562,2.062 16.325,2.825 18.55,2.825 20.25,4.525 v1@25.975,4.525
  other v1: 15.55,0.975 25.95,4.525
SREAD: ADF.27 U1.26 | length 15.1
  Top Layer w0.2: v1@24.6,1.75 ADF.27
  Top Layer w0.25: U1.26 14.872,-0.3 v1@15.575,-0.3
  Bottom Layer w0.25: v1@15.475,-0.3 15.6,-0.175 19.625,-0.175 20.7,0.9 23.7,0.9 v1@24.475,1.675
  other v1: 15.525,-0.3 24.5,1.675
SWD: ADF.33 U1.19 | length 16.3
  Top Layer w0.2: v1@25.55,-1.25 ADF.33
  Top Layer w0.25: U1.19 17.3,2.397 17.3,-0.8 v1(17,-1.1)
  Bottom Layer w0.25: v1@16.925,-1.075 v1@16.975,-1.025 ; v1(17,-1.1) 17.35,-0.75 24.725,-0.75 v1(25.35,-1.375)
TEST_A: ADF.23 | length 2.6
  Top Layer w0.2: v1@27.925,5.8 28.75,4.975 ADF.23
  other v1: 27.875,6.05
V_BUS: C43.2 C45.2 MF.1 R3.1 U6.1 U7.1 | length 70.9
  Top Layer w0.25: v1@9.575,-8.425 MF.1@10.425,-8.425 ; MF.1@11.725,-8.25 R3.1@13.35,-8.25 ; v1(28.05,8.175) U7.1@28.75,8.175 ; v1(53.7,7.7) U6.1@54.4,7.7
  Bottom Layer w0.25: 25.925,8.85 31.55,8.85 C43.2 32.05,8.175 32.875,7.35 42.95,7.35 44.125,6.175 50.425,6.175 51.15,6.9 C45.2 51.75,7.7 v1(53.7,7.7) ; v1(28.05,8.175) 28.05,8.85
  Bottom Layer w0.35: v1(9.55,-8.425) 6.175,-5.05 6.175,5.775 7.9,7.5 24.575,7.5 25.925,8.85
V_BUS_LNA: C42.2 R5.2 U7.5 | length 14.1
  Top Layer w0.25: v1(30.485,8.15) U7.5@31.185,8.15 ; v1(38.175,4.525) 38.525,4.875 R5.2
  Top Layer w0.34: U7.5 C42.2@32.9,8.175
  L3 w0.25: v1(30.485,8.15) 30.485,7.22 31.255,6.45 37.65,6.45 38.175,5.925 v1(38.175,4.525)
V_BUS_PA: C39.2 R6.2 U6.5 | length 21.5
  Top Layer w0.2: U6.5 v1@58.735,7.7
  Top Layer w0.25: R6.2@56.5,-8.3 v1@57.325,-8.3 ; C39.2@58.8,7.065 v1(58.8,7.765)
  L3 w0.25: v1@57.595,-8.32 61,-4.915 61,5.425 58.8,7.625 v1(58.8,7.765)
  other v1: 57.65,-8.275
VCC: ADF.3 ADF.9 ADF.32 ADF.40 ADF.43 C2.2 C3.2 C4.2 C7.1 C11.2 C13.2 C16.2 C40.2 C41.1 C59.2 C65.1 C67.2 C68.2 D2.1 D3.1 L6.2 U1.4 U1.27 U1.32 Y3.4 | length 40.4
  Top Layer w0.2: U1.4 22.375,-4.941 v1(22.375,-6.475) Y3.4@21.225,-6.475 ; C65.1@21.629,-4.021 23.825,-1.825 23.825,-1.575 24.65,-0.75 ADF.32 ; v1@29.55,-4.6 29.75,-4.4 ADF.40 29.75,-2.975 29.9,-2.825 31.1,-2.825 31.25,-2.975 ADF.43 ; ADF.3 35.95,-1.75 v1@36.1,-1.9 ; ADF.9 v1@35.575,1.25
  Top Layer w0.25: v1@9.675,-1.4 C68.2@10.525,-1.4 ; C67.2@10.8,2.925 v1(11.65,2.925) ; v1(11.65,-2.85) 13.453,-2.85 U1.27 ; v1(11.75,6.725) D3.1@15.325,6.725 ; v1(16.3,-7.3) C59.2@17,-6.6 ; C59.2@16.8,-6.4 16.8,-5.16 U1.32 ; C13.2@26.225,6.775 v1(27.075,6.775) ; C4.2@26.5,-8.65 v1(27,-8.15) ; v1(36.75,-3.65) L6.2@37.5,-3.65 ; v1(36.95,5.5) 37,5.5 37.5,6 C2.2@37.5,6.6
  Bottom Layer w0.2: v1(22.375,-6.475) C40.2@23.239,-5.611 ; C41.1 v1@35.425,1.575 ; C16.2 36.287,5.5 v1(36.95,5.5)
  Bottom Layer w0.25: C3.2@10.5,-2.85 v1(11.65,-2.85) ; v1(36.1,-1.95) C11.2@38.325,-1.95
  other v1: 29.525,-4.775 9.65,-1.4 35.65,1.35
VCOIN: ADF.1 C57.2 R10.1 | length 12.6
  Top Layer w0.2: ADF.1 34.575,-3.075 v1(35.075,-3.575)
  Top Layer w0.25: C57.2@28,-8.65 28.2,-8.45 29.3,-8.45 R10.1@29.5,-8.65 ; C57.2@28.175,-8.3 R10.1@29.275,-8.3
  Bottom Layer w0.25: v1@28.739,-8.204 30.719,-6.225 33.35,-6.225 35.075,-4.5 v1(35.075,-3.575)
  other v1: 28.739,-8.35
X1: C20.1 U1.1 | length 1.4
  Top Layer w0.25: C20.1@18.65,-6.225 18.65,-5.45 U1.1@19.1,-5
pads on no net: ADF.13 ADF.14 ADF.15 ADF.16 ADF.17 ADF.18 ADF.20 ADF.21 ADF.30 ADF.37 ADF.38 U1.2 U1.6 U1.9 U1.22 U6.4 U7.4 USB.MH1 USB.MH2 Y3.1

## Polygon pours and split planes (outlines as drawn)
GND on L3 "c" (solid, pour order 4): 45,-8.71 56.04,-8.71 59.5,-5.25 59.5,5.096 59.5,5.5 57.5,7.5 56,9 48.475,9 45,9
VCC on L3 "b-VCC" (solid, remove dead copper, pour order 1000): 4.225,-9.126 4.225,-6.133 8.525,-2.936 8.85,-2.694 8.85,5.243 8.85,5.671 11,7.269 11.075,7.325 43.45,7.325 43.55,7.325 44.425,6.674 44.5,6.619 44.5,-9.2
GND on L2 "L2-GND" (solid, remove dead copper, pour order 3): 3.575,-9.34 0.01,-5.775 0.001,-5.775 0.001,5.771 0,5.772 3.566,9.338 3.575,9.338 58.436,9.338 59.2,8.574 62,5.774 62,4.275 62,-5.774 58.45,-9.324 58.434,-9.34 56.875,-9.34
GND on Bottom Layer "c" (solid, remove dead copper, pour order 6): 39.5,-10.1 39.5,9.221 43.001,12.155 43.293,12.4 61.675,12.4 61.675,-10.1

## Keep-outs
Keep-Out Layer:
  lines w0.25: 0.253,6.025 0,5.772 0,-5.774 3.566,-9.34 58.434,-9.34 61.734,-6.04 61.735,-6.04 62,-5.775 62,5.774 58.434,9.34 3.566,9.34 3.566,9.338 0.268,6.04 0.265,6.04

## Other copper
Top Layer:
  rectangle net GND: 44.475,-4.536 46.65,1.6
  text "S" at 10.645,26.225 h3
  text "A" at 13.048,26.225 h3
  text "T" at 15.794,26.225 h3
  text "L" at 17.853,26.225 h3
  text "A" at 20.256,26.225 h3
  text "B" at 23.002,26.225 h3
  text "." at 25.748,26.225 h3
  text "o" at 26.778,26.225 h3
  text "r" at 28.838,26.225 h3
  text "g" at 30.554,26.225 h3
  text "(" at 33.643,26.225 h3
  text "C" at 35.016,26.225 h3
  text "C" at 38.106,26.225 h3
  text "B" at 42.225,26.225 h3
  text "Y" at 44.971,26.225 h3
  text "-" at 47.717,26.225 h3
  text "S" at 49.09,26.225 h3
  text "A" at 51.493,26.225 h3
  text ")" at 54.239,26.225 h3
  text "B" at 10.605,22.875 h3
  text "l" at 12.285,22.875 h3
  text "u" at 12.957,22.875 h3
  text "e" at 14.301,22.875 h3
  text "B" at 15.308,22.875 h3
  text "o" at 16.988,22.875 h3
  text "x" at 18.332,22.875 h3
  text "M" at 20.348,22.875 h3
  text "i" at 22.364,22.875 h3
  text "c" at 23.036,22.875 h3
  text "r" at 24.043,22.875 h3
  text "o" at 24.715,22.875 h3
  text "1" at 26.731,22.875 h3
  text "B" at 28.075,22.875 h3
  text "h" at 10.904,19.492 h3
  text "p" at 12.258,19.492 h3
  text "m" at 13.612,19.492 h3
  text "@" at 15.304,19.492 h3
  text "s" at 17.335,19.492 h3
  text "a" at 18.351,19.492 h3
  text "t" at 19.366,19.492 h3
  text "l" at 20.043,19.492 h3
  text "a" at 20.72,19.492 h3
  text "b" at 21.736,19.492 h3
  text "." at 23.09,19.492 h3
  text "o" at 23.767,19.492 h3
  text "r" at 25.121,19.492 h3
  text "g" at 25.798,19.492 h3

## Silkscreen, mask and mechanical layers (free items; w line width, h text height)
Top Overlay:
  text "satlab" at 40.55,-8.9 h1.1
Bottom Overlay:
  drawing of 1555 lines, arcs and shapes, not listed
  text "BlueBox Micro" at 23.175,7.15 h1.1
  text "Rev.1B" at 11.9,5.125 h1.1
  text "space.aau.dk / satlab.org" at 29.8,-8.5 h1.1
Mechanical 14:
  lines w0.25: 3.566,9.338 0,5.772 0,-5.774 3.566,-9.34 58.434,-9.34 61.734,-6.04 62,-5.774 62,5.774 61.734,6.04 58.434,9.34 3.566,9.34

## Dimensions
61.734,6.04 to 58.434,-9.34 on Mechanical 15
0,5.772 to 62,2.5 on Mechanical 15

## Text inside footprints (layer, text, board x,y; h text height)
USB: Mechanical 1 "PCB Edge" at -0.223,5.173 h0.25 r270